# EAGLE board 3 (EAGLE 9.7.0)

Size 87.57 x 36.77 mm. Coordinates in mm from the lower left corner, seen from the top.
Outline: 0,0 87.56,0 87.56,36.77 0,36.77 0,0
Copper layers (1*16): Top 0.035mm / dielectric 1.5mm / Bottom 0.035mm
Design rules "default": minimum track width 6mil, minimum drill 0.35mm, track to track 6mil, track to pad 6mil, pad to pad 6mil, via to via 6mil, smd to smd 6mil, copper to edge 40mil, drill to drill 6mil, minimum pad ring 10mil, minimum via ring 8mil, stop-mask expansion 4mil, vias tented up to drill 0mil, thermal gap 10mil

## Footprints (pad centres in the part's own frame; a part is rotated, then mirrored left to right if it is on the bottom)
BATTERY-GENERIC = drill 1.118 pad 3.15 octagon: + 2.54,0; - -2.54,0
LEDRD254W60D565H860B = drill 0.981 pad 1.581: 1 -1.27,0; 2 1.27,0
SWITCH-SPDT-PTH-8.5X3.7MM = drill 1.016 pad 1.88: 1 -2.54,0; 2 0,0; 3 2.54,0
DIP762W53P254L1969H508Q14B = drill 0.743 pad 1.343: 1 -3.81,7.62; 2 -3.81,5.08; 3 -3.81,2.54; 4 -3.81,0; 5 -3.81,-2.54; 6 -3.81,-5.08; 7 -3.81,-7.62; 8 3.81,-7.62; 9 3.81,-5.08; 10 3.81,-2.54; 11 3.81,0; 12 3.81,2.54; 13 3.81,5.08; 14 3.81,7.62

## Placement (x,y rotation side)
BAT1  1.5V  [BATTERY-GENERIC]  8.26,8.26 0 top
D1  RED  [LEDRD254W60D565H860B]  81.51,21.96 180 top
S1  TOGGLE  [SWITCH-SPDT-PTH-8.5X3.7MM]  47.04,10.65 0 top
U2  74HC86_PDIP  [DIP762W53P254L1969H508Q14B]  54.7,29.11 90 top

## Library data of the parts
BAT1 S1 U2 = Tinkercad
D1 = Tinkercad; CATEGORY: Opto-Electronic; SUB-CATEGORY: LED; VALUE: LED_RED

## Nets
BAT1+: BAT1.+ S1.3
BAT1-: BAT1.- D1.2
U2_1A: S1.1 U2.1
U2_1B: S1.2 U2.2
U2_1Y: D1.1 U2.3

## Tracks (layer width: path | path; a pad name or v marks a point on that pad's centre or on a via)
BAT1+  (1 unrouted)
BAT1-  (1 unrouted)
U2_1A  (1 unrouted)
U2_1B  (1 unrouted)
U2_1Y  (1 unrouted)